# EAGLE board Drury-DABSC_array (EAGLE 7.7.0)
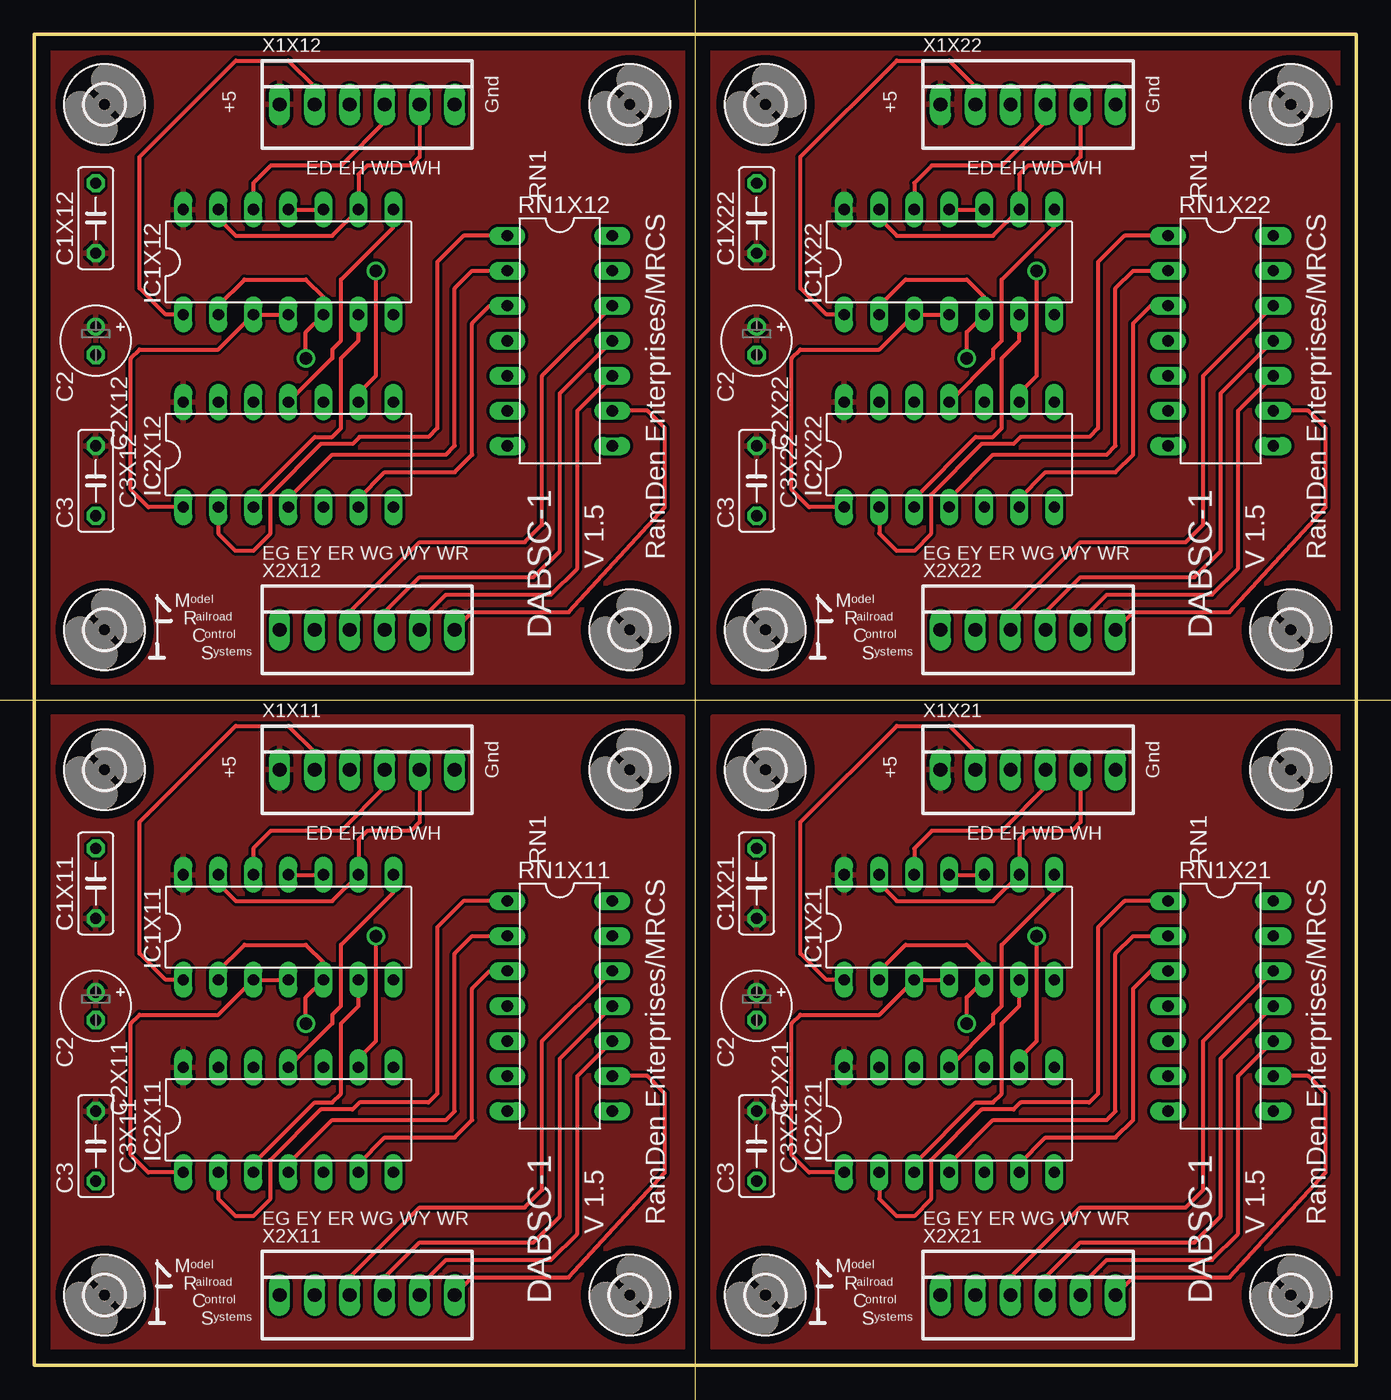
[diagram p0: board, top side]
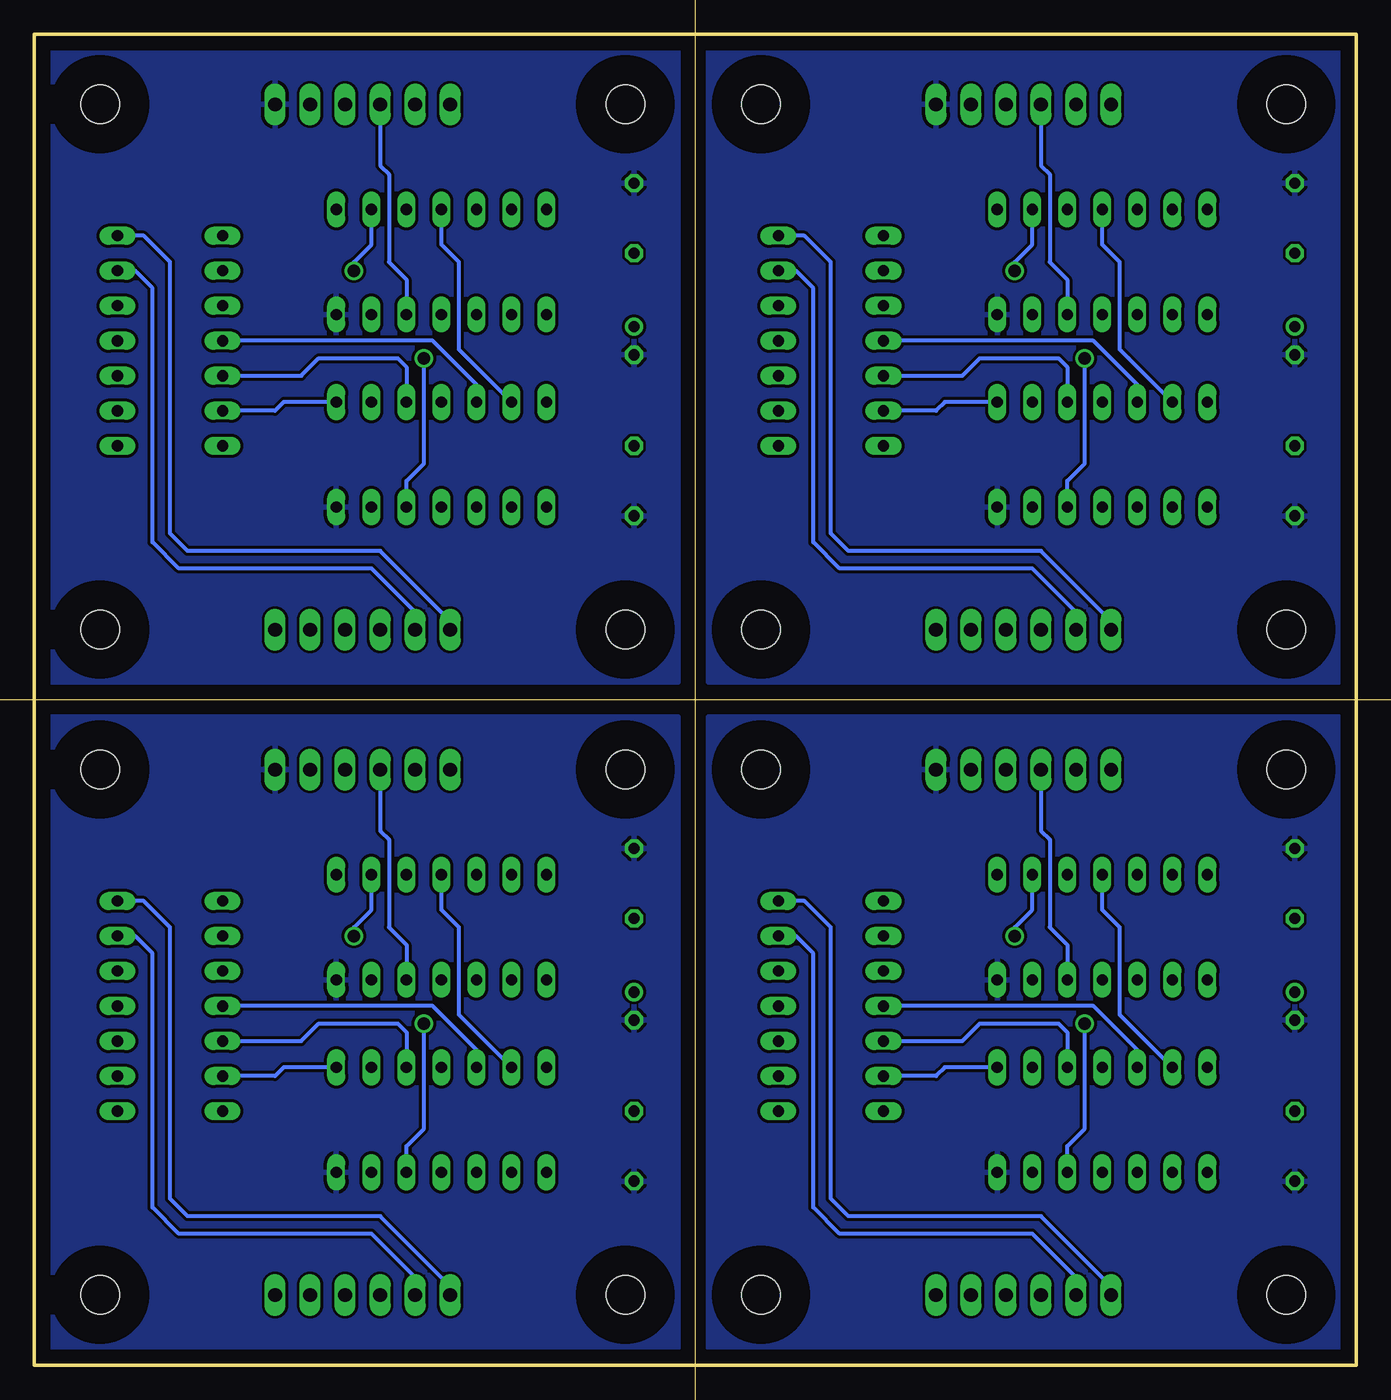
[diagram p1: board, bottom side, seen from below]

Size 95.86 x 96.5 mm. Coordinates in mm from the lower left corner, seen from the top.
Outline: 0,0 95.86,0 95.86,96.5 0,96.5 0,0
Copper layers (1*16): Top 0.035mm / dielectric 1.5mm / Bottom 0.035mm
Design rules "default": minimum track width 10mil, minimum drill 0.6mm, track to track 8mil, track to pad 8mil, pad to pad 8mil, via to via 8mil, smd to smd 8mil, copper to edge 40mil, drill to drill 8mil, minimum pad ring 10mil, minimum via ring 8mil, stop-mask expansion 4mil, vias tented up to drill 0mil, thermal gap 10mil
Milling: 2 lines

## Footprints (pad centres in the part's own frame; a part is rotated, then mirrored left to right if it is on the bottom)
C050-025X075 = drill 0.813 octagon: 1 -2.54,0; 2 2.54,0
E2-5 = drill 0.813 pad 1.27: + -1.016,0 | drill 0.813 pad 1.27 octagon: - 1.016,0
DIL14 = drill 0.813 long: 1 -7.62,-3.81; 2 -5.08,-3.81; 3 -2.54,-3.81; 4 0,-3.81; 5 2.54,-3.81; 6 5.08,-3.81; 7 7.62,-3.81; 8 7.62,3.81; 9 5.08,3.81; 10 2.54,3.81; 11 0,3.81; 12 -2.54,3.81; 13 -5.08,3.81; 14 -7.62,3.81
2,8 = hole 2.8: 0,0
22-23-2061 = drill 1 long: 1 -6.35,0; 2 -3.81,0; 3 -1.27,0; 4 1.27,0; 5 3.81,0; 6 6.35,0

## Placement (x,y rotation side)
C1X11  .01uf  [C050-025X075]  4.45,34.92 90 top
C1X12  .01uf  [C050-025X075]  4.45,83.17 90 top
C1X21  .01uf  [C050-025X075]  52.38,34.92 90 top
C1X22  .01uf  [C050-025X075]  52.38,83.17 90 top
C2X11  10uF  [E2-5]  4.45,26.04 270 top
C2X12  10uF  [E2-5]  4.45,74.28 270 top
C2X21  10uF  [E2-5]  52.38,26.04 270 top
C2X22  10uF  [E2-5]  52.38,74.28 270 top
C3X11  .01uf  [C050-025X075]  4.45,15.88 270 top
C3X12  .01uf  [C050-025X075]  4.45,64.12 270 top
C3X21  .01uf  [C050-025X075]  52.38,15.88 270 top
C3X22  .01uf  [C050-025X075]  52.38,64.12 270 top
IC1X11  74LS00N  [DIL14]  18.41,31.75 0 top
IC1X12  74LS00N  [DIL14]  18.41,80 0 top
IC1X21  74LS00N  [DIL14]  66.34,31.75 0 top
IC1X22  74LS00N  [DIL14]  66.34,80 0 top
IC2X11  7407N  [DIL14]  18.41,17.78 0 top
IC2X12  7407N  [DIL14]  18.41,66.03 0 top
IC2X21  7407N  [DIL14]  66.34,17.78 0 top
IC2X22  7407N  [DIL14]  66.34,66.03 0 top
RN1X11  1K  [DIL14]  38.1,26.04 270 top
RN1X12  1K  [DIL14]  38.1,74.28 270 top
RN1X21  1K  [DIL14]  86.03,26.04 270 top
RN1X22  1K  [DIL14]  86.03,74.28 270 top
U$1X11  [2,8]  5.08,43.18 0 top
U$1X12  [2,8]  5.08,91.43 0 top
U$1X21  [2,8]  53.01,43.18 0 top
U$1X22  [2,8]  53.01,91.43 0 top
U$2X11  [2,8]  43.18,43.18 0 top
U$2X12  [2,8]  43.18,91.43 0 top
U$2X21  [2,8]  91.11,43.18 0 top
U$2X22  [2,8]  91.11,91.43 0 top
U$3X11  [2,8]  5.08,5.08 0 top
U$3X12  [2,8]  5.08,53.33 0 top
U$3X21  [2,8]  53.01,5.08 0 top
U$3X22  [2,8]  53.01,53.33 0 top
U$4X11  [2,8]  43.18,5.08 0 top
U$4X12  [2,8]  43.18,53.33 0 top
U$4X21  [2,8]  91.11,5.08 0 top
U$4X22  [2,8]  91.11,53.33 0 top
U$5X11  [MRCSLOGOTOP]  7.62,2.54 0 top
U$5X12  [MRCSLOGOTOP]  7.62,50.79 0 top
U$5X21  [MRCSLOGOTOP]  55.55,2.54 0 top
U$5X22  [MRCSLOGOTOP]  55.55,50.79 0 top
U$6X11  [CA-PROP65-BACK]  34.92,6.99 0 top
U$6X12  [CA-PROP65-BACK]  34.92,55.23 0 top
U$6X21  [CA-PROP65-BACK]  82.86,6.99 0 top
U$6X22  [CA-PROP65-BACK]  82.86,55.23 0 top
X1X11  P1  [22-23-2061]  24.13,43.18 0 top
X1X12  P1  [22-23-2061]  24.13,91.43 0 top
X1X21  P1  [22-23-2061]  72.06,43.18 0 top
X1X22  P1  [22-23-2061]  72.06,91.43 0 top
X2X11  P2  [22-23-2061]  24.13,5.08 0 top
X2X12  P2  [22-23-2061]  24.13,53.33 0 top
X2X21  P2  [22-23-2061]  72.06,5.08 0 top
X2X22  P2  [22-23-2061]  72.06,53.33 0 top

## Library data of the parts
C1X11 C1X12 C1X21 C1X22 C3X11 C3X12 C3X21 C3X22 = resistor
C2X11 C2X12 C2X21 C2X22 U$5X11 U$5X12 U$5X21 U$5X22 U$6X11 U$6X12 U$6X21 U$6X22 = SPCoast
IC1X11 IC1X12 IC1X21 IC1X22 IC2X11 IC2X12 IC2X21 IC2X22 = 74xx-us
RN1X11 RN1X12 RN1X21 RN1X22 = resistor-dil
U$1X11 U$1X12 U$1X21 U$1X22 U$2X11 U$2X12 U$2X21 U$2X22 U$3X11 U$3X12 U$3X21 U$3X22 U$4X11 U$4X12 U$4X21 U$4X22 = holes
X1X11 X1X12 X1X21 X1X22 X2X11 X2X12 X2X21 X2X22 = con-molex

## Nets
GNDX11: C1X11.2 C2X11.- C3X11.2 IC1X11.7 IC2X11.7 X1X11.6
GNDX12: C1X12.2 C2X12.- C3X12.2 IC1X12.7 IC2X12.7 X1X12.6
GNDX21: C1X21.2 C2X21.- C3X21.2 IC1X21.7 IC2X21.7 X1X21.6
GNDX22: C1X22.2 C2X22.- C3X22.2 IC1X22.7 IC2X22.7 X1X22.6
N$1X11: IC1X11.3 IC1X11.4 IC2X11.1
N$1X12: IC1X12.3 IC1X12.4 IC2X12.1
N$1X21: IC1X21.3 IC1X21.4 IC2X21.1
N$1X22: IC1X22.3 IC1X22.4 IC2X22.1
N$2X11: IC1X11.6 IC2X11.3
N$2X12: IC1X12.6 IC2X12.3
N$2X21: IC1X21.6 IC2X21.3
N$2X22: IC1X22.6 IC2X22.3
N$3X11: IC2X11.2 RN1X11.1
N$3X12: IC2X12.2 RN1X12.1
N$3X21: IC2X21.2 RN1X21.1
N$3X22: IC2X22.2 RN1X22.1
N$4X11: IC1X11.8 IC2X11.11
N$4X12: IC1X12.8 IC2X12.11
N$4X21: IC1X21.8 IC2X21.11
N$4X22: IC1X22.8 IC2X22.11
N$5X11: IC2X11.4 RN1X11.2
N$5X12: IC2X12.4 RN1X12.2
N$5X21: IC2X21.4 RN1X21.2
N$5X22: IC2X22.4 RN1X22.2
N$6X11: IC1X11.10 IC1X11.11 IC2X11.13
N$6X12: IC1X12.10 IC1X12.11 IC2X12.13
N$6X21: IC1X21.10 IC1X21.11 IC2X21.13
N$6X22: IC1X22.10 IC1X22.11 IC2X22.13
N$7X11: IC2X11.6 RN1X11.3
N$7X12: IC2X12.6 RN1X12.3
N$7X21: IC2X21.6 RN1X21.3
N$7X22: IC2X22.6 RN1X22.3
N$8X11: RN1X11.14 X2X11.1
N$8X12: RN1X12.14 X2X12.1
N$8X21: RN1X21.14 X2X21.1
N$8X22: RN1X22.14 X2X22.1
N$9X11: RN1X11.13 X2X11.2
N$9X12: RN1X12.13 X2X12.2
N$9X21: RN1X21.13 X2X21.2
N$9X22: RN1X22.13 X2X22.2
N$10X11: IC1X11.1 X1X11.2
N$10X12: IC1X12.1 X1X12.2
N$10X21: IC1X21.1 X1X21.2
N$10X22: IC1X22.1 X1X22.2
N$11X11: IC1X11.2 IC1X11.5 IC2X11.5 X1X11.3
N$11X12: IC1X12.2 IC1X12.5 IC2X12.5 X1X12.3
N$11X21: IC1X21.2 IC1X21.5 IC2X21.5 X1X21.3
N$11X22: IC1X22.2 IC1X22.5 IC2X22.5 X1X22.3
N$12X11: RN1X11.12 X2X11.3
N$12X12: RN1X12.12 X2X12.3
N$12X21: RN1X21.12 X2X21.3
N$12X22: RN1X22.12 X2X22.3
N$13X11: IC2X11.12 RN1X11.4
N$13X12: IC2X12.12 RN1X12.4
N$13X21: IC2X21.12 RN1X21.4
N$13X22: IC2X22.12 RN1X22.4
N$14X11: IC2X11.10 RN1X11.5
N$14X12: IC2X12.10 RN1X12.5
N$14X21: IC2X21.10 RN1X21.5
N$14X22: IC2X22.10 RN1X22.5
N$15X11: IC2X11.8 RN1X11.6
N$15X12: IC2X12.8 RN1X12.6
N$15X21: IC2X21.8 RN1X21.6
N$15X22: IC2X22.8 RN1X22.6
N$16X11: RN1X11.9 X2X11.6
N$16X12: RN1X12.9 X2X12.6
N$16X21: RN1X21.9 X2X21.6
N$16X22: RN1X22.9 X2X22.6
N$17X11: RN1X11.10 X2X11.5
N$17X12: RN1X12.10 X2X12.5
N$17X21: RN1X21.10 X2X21.5
N$17X22: RN1X22.10 X2X22.5
N$18X11: IC1X11.12 X1X11.4
N$18X12: IC1X12.12 X1X12.4
N$18X21: IC1X21.12 X1X21.4
N$18X22: IC1X22.12 X1X22.4
N$19X11: RN1X11.11 X2X11.4
N$19X12: RN1X12.11 X2X12.4
N$19X21: RN1X21.11 X2X21.4
N$19X22: RN1X22.11 X2X22.4
N$21X11: IC1X11.9 IC1X11.13 IC2X11.9 X1X11.5
N$21X12: IC1X12.9 IC1X12.13 IC2X12.9 X1X12.5
N$21X21: IC1X21.9 IC1X21.13 IC2X21.9 X1X21.5
N$21X22: IC1X22.9 IC1X22.13 IC2X22.9 X1X22.5
VCCX11: C1X11.1 C2X11.+ C3X11.1 IC1X11.14 IC2X11.14 X1X11.1
VCCX12: C1X12.1 C2X12.+ C3X12.1 IC1X12.14 IC2X12.14 X1X12.1
VCCX21: C1X21.1 C2X21.+ C3X21.1 IC1X21.14 IC2X21.14 X1X21.1
VCCX22: C1X22.1 C2X22.+ C3X22.1 IC1X22.14 IC2X22.14 X1X22.1

## Tracks (layer width: path | path; a pad name or v marks a point on that pad's centre or on a via)
GNDX11
  pour Bottom: 1.27,1.27 46.99,1.27 46.99,46.99 1.27,46.99
GNDX12
  pour Bottom: 1.27,49.52 46.99,49.52 46.99,95.24 1.27,95.24
GNDX21
  pour Bottom: 49.2,1.27 94.92,1.27 94.92,46.99 49.2,46.99
GNDX22
  pour Bottom: 49.2,49.52 94.92,49.52 94.92,95.24 49.2,95.24
N$1X11
  Top 0.305: IC2X11.1 8.26,13.97 6.99,15.24 6.99,24.77 7.62,25.4 13.34,25.4 IC1X11.3 IC1X11.4
N$1X12
  Top 0.305: IC2X12.1 8.26,62.22 6.99,63.49 6.99,73.02 7.62,73.65 13.34,73.65 IC1X12.3 IC1X12.4
N$1X21
  Top 0.305: IC2X21.1 56.19,13.97 54.91,15.24 54.91,24.77 55.55,25.4 61.27,25.4 IC1X21.3 IC1X21.4
N$1X22
  Top 0.305: IC2X22.1 56.19,62.22 54.91,63.49 54.91,73.02 55.55,73.65 61.27,73.65 IC1X22.3 IC1X22.4
N$2X11
  Top 0.305: IC2X11.3 15.88,14.61 20.32,19.05 21.59,19.05 22.23,19.68 22.23,24.77 23.5,26.04 IC1X11.6
N$2X12
  Top 0.305: IC2X12.3 15.88,62.85 20.32,67.3 21.59,67.3 22.23,67.94 22.23,73.02 23.5,74.28 IC1X12.6
N$2X21
  Top 0.305: IC2X21.3 63.8,14.61 68.25,19.05 69.52,19.05 70.16,19.68 70.16,24.77 71.42,26.04 IC1X21.6
N$2X22
  Top 0.305: IC2X22.3 63.8,62.85 68.25,67.3 69.52,67.3 70.16,67.94 70.16,73.02 71.42,74.28 IC1X22.6
N$3X11
  Top 0.305: RN1X11.1 31.11,33.66 29.21,31.75 29.21,19.68 28.57,19.05 23.58,19.05 23.07,18.54 20.76,18.54 17.08,14.86 17.08,12 15.88,10.79 14.61,10.79 13.34,12.06 IC2X11.2
N$3X12
  Top 0.305: RN1X12.1 31.11,81.91 29.21,80 29.21,67.94 28.57,67.3 23.58,67.3 23.07,66.79 20.76,66.79 17.08,63.11 17.08,60.25 15.88,59.05 14.61,59.05 13.34,60.31 IC2X12.2
N$3X21
  Top 0.305: RN1X21.1 79.05,33.66 77.14,31.75 77.14,19.68 76.5,19.05 71.51,19.05 71,18.54 68.69,18.54 65.01,14.86 65.01,12 63.8,10.79 62.53,10.79 61.27,12.06 IC2X21.2
N$3X22
  Top 0.305: RN1X22.1 79.05,81.91 77.14,80 77.14,67.94 76.5,67.3 71.51,67.3 71,66.79 68.69,66.79 65.01,63.11 65.01,60.25 63.8,59.05 62.53,59.05 61.27,60.31 IC2X22.2
N$4X11
  Top 0.305: IC1X11.8 26.04,34.29 22.23,30.48 22.23,26.04 21.59,25.4 21.59,24.77 IC2X11.11
N$4X12
  Top 0.305: IC1X12.8 26.04,82.54 22.23,78.73 22.23,74.28 21.59,73.65 21.59,73.02 IC2X12.11
N$4X21
  Top 0.305: IC1X21.8 73.97,34.29 70.16,30.48 70.16,26.04 69.52,25.4 69.52,24.77 IC2X21.11
N$4X22
  Top 0.305: IC1X22.8 73.97,82.54 70.16,78.73 70.16,74.28 69.52,73.65 69.52,73.02 IC2X22.11
N$5X11
  Top 0.305: IC2X11.4 18.41,14.61 21.59,17.78 29.84,17.78 30.48,18.41 30.48,29.84 31.75,31.11 RN1X11.2
N$5X12
  Top 0.305: IC2X12.4 18.41,62.85 21.59,66.03 29.84,66.03 30.48,66.67 30.48,78.09 31.75,79.36 RN1X12.2
N$5X21
  Top 0.305: IC2X21.4 66.34,14.61 69.52,17.78 77.78,17.78 78.41,18.41 78.41,29.84 79.68,31.11 RN1X21.2
N$5X22
  Top 0.305: IC2X22.4 66.34,62.85 69.52,66.03 77.78,66.03 78.41,66.67 78.41,78.09 79.68,79.36 RN1X22.2
N$6X11
  Top 0.305: IC1X11.11 IC1X11.10
  Bottom 0.305: IC2X11.13 17.14,25.4 17.14,31.75 18.41,33.02 IC1X11.11
N$6X12
  Top 0.305: IC1X12.11 IC1X12.10
  Bottom 0.305: IC2X12.13 17.14,73.65 17.14,80 18.41,81.27 IC1X12.11
N$6X21
  Top 0.305: IC1X21.11 IC1X21.10
  Bottom 0.305: IC2X21.13 65.08,25.4 65.08,31.75 66.34,33.02 IC1X21.11
N$6X22
  Top 0.305: IC1X22.11 IC1X22.10
  Bottom 0.305: IC2X22.13 65.08,73.65 65.08,80 66.34,81.27 IC1X22.11
N$7X11
  Top 0.305: IC2X11.6 23.5,14.61 25.4,16.51 30.48,16.51 31.75,17.78 31.75,27.3 33.02,28.57 RN1X11.3
N$7X12
  Top 0.305: IC2X12.6 23.5,62.85 25.4,64.76 30.48,64.76 31.75,66.03 31.75,75.56 33.02,76.83 RN1X12.3
N$7X21
  Top 0.305: IC2X21.6 71.42,14.61 73.33,16.51 78.41,16.51 79.68,17.78 79.68,27.3 80.95,28.57 RN1X21.3
N$7X22
  Top 0.305: IC2X22.6 71.42,62.85 73.33,64.76 78.41,64.76 79.68,66.03 79.68,75.56 80.95,76.83 RN1X22.3
N$8X11
  Bottom 0.305: X2X11.1 17.78,5.71 22.86,10.79 36.83,10.79 38.1,12.06 38.1,31.75 40.01,33.66 RN1X11.14
N$8X12
  Bottom 0.305: X2X12.1 17.78,53.97 22.86,59.05 36.83,59.05 38.1,60.31 38.1,80 40.01,81.91 RN1X12.14
N$8X21
  Bottom 0.305: X2X21.1 65.71,5.71 70.79,10.79 84.76,10.79 86.03,12.06 86.03,31.75 87.94,33.66 RN1X21.14
N$8X22
  Bottom 0.305: X2X22.1 65.71,53.97 70.79,59.05 84.76,59.05 86.03,60.31 86.03,80 87.94,81.91 RN1X22.14
N$9X11
  Bottom 0.305: X2X11.2 20.32,6.35 23.5,9.53 37.47,9.53 39.37,11.43 39.37,29.84 40.64,31.11 RN1X11.13
N$9X12
  Bottom 0.305: X2X12.2 20.32,54.6 23.5,57.77 37.47,57.77 39.37,59.68 39.37,78.09 40.64,79.36 RN1X12.13
N$9X21
  Bottom 0.305: X2X21.2 68.25,6.35 71.42,9.53 85.39,9.53 87.3,11.43 87.3,29.84 88.57,31.11 RN1X21.13
N$9X22
  Bottom 0.305: X2X22.2 68.25,54.6 71.42,57.77 85.39,57.77 87.3,59.68 87.3,78.09 88.57,79.36 RN1X22.13
N$10X11
  Top 0.305: IC1X11.1 9.53,27.94 7.62,29.84 7.62,39.37 14.61,46.35 18.41,46.35 20.32,44.45 X1X11.2
N$10X12
  Top 0.305: IC1X12.1 9.53,76.19 7.62,78.09 7.62,87.62 14.61,94.61 18.41,94.61 20.32,92.7 X1X12.2
N$10X21
  Top 0.305: IC1X21.1 57.45,27.94 55.55,29.84 55.55,39.37 62.53,46.35 66.34,46.35 68.25,44.45 X1X21.2
N$10X22
  Top 0.305: IC1X22.1 57.45,76.19 55.55,78.09 55.55,87.62 62.53,94.61 66.34,94.61 68.25,92.7 X1X22.2
N$11X11  (via drill 0.9 pad 1.35)
  Top 0.305: IC1X11.2 13.34,28.57 15.24,30.48 19.68,30.48 20.95,29.21 IC1X11.5 19.68,26.67 v19.68,24.77
  Bottom 0.305: X1X11.3 22.86,38.73 22.23,38.1 22.23,31.75 20.95,30.48 IC1X11.5 | IC2X11.5 20.95,15.88 19.68,17.14 v19.68,24.77
N$11X12  (via drill 0.9 pad 1.35)
  Top 0.305: IC1X12.2 13.34,76.83 15.24,78.73 19.68,78.73 20.95,77.46 IC1X12.5 19.68,74.92 v19.68,73.02
  Bottom 0.305: X1X12.3 22.86,86.98 22.23,86.35 22.23,80 20.95,78.73 IC1X12.5 | IC2X12.5 20.95,64.12 19.68,65.39 v19.68,73.02
N$11X21  (via drill 0.9 pad 1.35)
  Top 0.305: IC1X21.2 61.27,28.57 63.17,30.48 67.61,30.48 68.89,29.21 IC1X21.5 67.61,26.67 v67.61,24.77
  Bottom 0.305: X1X21.3 70.79,38.73 70.16,38.1 70.16,31.75 68.89,30.48 IC1X21.5 | IC2X21.5 68.89,15.88 67.61,17.14 v67.61,24.77
N$11X22  (via drill 0.9 pad 1.35)
  Top 0.305: IC1X22.2 61.27,76.83 63.17,78.73 67.61,78.73 68.89,77.46 IC1X22.5 67.61,74.92 v67.61,73.02
  Bottom 0.305: X1X22.3 70.79,86.98 70.16,86.35 70.16,80 68.89,78.73 IC1X22.5 | IC2X22.5 68.89,64.12 67.61,65.39 v67.61,73.02
N$12X11
  Top 0.305: X2X11.3 22.86,6.35 27.94,11.43 35.56,11.43 36.83,12.7 36.83,23.5 RN1X11.12
N$12X12
  Top 0.305: X2X12.3 22.86,54.6 27.94,59.68 35.56,59.68 36.83,60.95 36.83,71.75 RN1X12.12
N$12X21
  Top 0.305: X2X21.3 70.79,6.35 75.87,11.43 83.49,11.43 84.76,12.7 84.76,23.5 RN1X21.12
N$12X22
  Top 0.305: X2X22.3 70.79,54.6 75.87,59.68 83.49,59.68 84.76,60.95 84.76,71.75 RN1X22.12
N$13X11
  Bottom 0.305: IC2X11.12 15.88,22.86 19.05,26.04 RN1X11.4
N$13X12
  Bottom 0.305: IC2X12.12 15.88,71.11 19.05,74.28 RN1X12.4
N$13X21
  Bottom 0.305: IC2X21.12 63.8,22.86 66.98,26.04 RN1X21.4
N$13X22
  Bottom 0.305: IC2X22.12 63.8,71.11 66.98,74.28 RN1X22.4
N$14X11
  Bottom 0.305: RN1X11.5 28.57,23.5 27.3,24.77 21.59,24.77 20.95,24.13 IC2X11.10
N$14X12
  Bottom 0.305: RN1X12.5 28.57,71.75 27.3,73.02 21.59,73.02 20.95,72.38 IC2X12.10
N$14X21
  Bottom 0.305: RN1X21.5 76.5,23.5 75.23,24.77 69.52,24.77 68.89,24.13 IC2X21.10
N$14X22
  Bottom 0.305: RN1X22.5 76.5,71.75 75.23,73.02 69.52,73.02 68.89,72.38 IC2X22.10
N$15X11
  Bottom 0.305: IC2X11.8 29.84,21.59 30.48,20.95 RN1X11.6
N$15X12
  Bottom 0.305: IC2X12.8 29.84,69.84 30.48,69.2 RN1X12.6
N$15X21
  Bottom 0.305: IC2X21.8 77.78,21.59 78.41,20.95 RN1X21.6
N$15X22
  Bottom 0.305: IC2X22.8 77.78,69.84 78.41,69.2 RN1X22.6
N$16X11
  Top 0.305: RN1X11.9 44.45,20.95 45.72,19.68 45.72,13.97 38.73,6.35 31.75,6.35 X2X11.6
N$16X12
  Top 0.305: RN1X12.9 44.45,69.2 45.72,67.94 45.72,62.22 38.73,54.6 31.75,54.6 X2X12.6
N$16X21
  Top 0.305: RN1X21.9 92.38,20.95 93.65,19.68 93.65,13.97 86.67,6.35 79.68,6.35 X2X21.6
N$16X22
  Top 0.305: RN1X22.9 92.38,69.2 93.65,67.94 93.65,62.22 86.67,54.6 79.68,54.6 X2X22.6
N$17X11
  Top 0.305: X2X11.5 27.94,5.71 29.84,7.62 37.47,7.62 39.37,9.53 39.37,20.95 RN1X11.10
N$17X12
  Top 0.305: X2X12.5 27.94,53.97 29.84,55.87 37.47,55.87 39.37,57.77 39.37,69.2 RN1X12.10
N$17X21
  Top 0.305: X2X21.5 75.87,5.71 77.78,7.62 85.39,7.62 87.3,9.53 87.3,20.95 RN1X21.10
N$17X22
  Top 0.305: X2X22.5 75.87,53.97 77.78,55.87 85.39,55.87 87.3,57.77 87.3,69.2 RN1X22.10
N$18X11
  Top 0.305: X1X11.4 25.4,41.91 22.23,38.73 17.14,38.73 15.88,37.47 IC1X11.12
N$18X12
  Top 0.305: X1X12.4 25.4,90.16 22.23,86.98 17.14,86.98 15.88,85.72 IC1X12.12
N$18X21
  Top 0.305: X1X21.4 73.33,41.91 70.16,38.73 65.08,38.73 63.8,37.47 IC1X21.12
N$18X22
  Top 0.305: X1X22.4 73.33,90.16 70.16,86.98 65.08,86.98 63.8,85.72 IC1X22.12
N$19X11
  Top 0.305: X2X11.4 25.4,6.35 27.94,8.89 36.2,8.89 38.1,10.79 38.1,22.23 RN1X11.11
N$19X12
  Top 0.305: X2X12.4 25.4,54.6 27.94,57.14 36.2,57.14 38.1,59.05 38.1,70.47 RN1X12.11
N$19X21
  Top 0.305: X2X21.4 73.33,6.35 75.87,8.89 84.12,8.89 86.03,10.79 86.03,22.23 RN1X21.11
N$19X22
  Top 0.305: X2X22.4 73.33,54.6 75.87,57.14 84.12,57.14 86.03,59.05 86.03,70.47 RN1X22.11
N$21X11  (via drill 0.9 pad 1.35)
  Top 0.305: X1X11.5 27.94,39.37 27.3,38.73 24.13,38.73 23.5,38.1 IC1X11.9 21.59,33.66 14.61,33.66 13.34,34.92 IC1X11.13 | IC2X11.9 23.5,22.23 24.77,23.5 v24.77,31.11
  Bottom 0.305: v24.77,31.11 24.77,31.75 23.5,33.02 IC1X11.9
N$21X12  (via drill 0.9 pad 1.35)
  Top 0.305: X1X12.5 27.94,87.62 27.3,86.98 24.13,86.98 23.5,86.35 IC1X12.9 21.59,81.91 14.61,81.91 13.34,83.17 IC1X12.13 | IC2X12.9 23.5,70.47 24.77,71.75 v24.77,79.36
  Bottom 0.305: v24.77,79.36 24.77,80 23.5,81.27 IC1X12.9
N$21X21  (via drill 0.9 pad 1.35)
  Top 0.305: X1X21.5 75.87,39.37 75.23,38.73 72.06,38.73 71.42,38.1 IC1X21.9 69.52,33.66 62.53,33.66 61.27,34.92 IC1X21.13 | IC2X21.9 71.42,22.23 72.69,23.5 v72.69,31.11
  Bottom 0.305: v72.69,31.11 72.69,31.75 71.42,33.02 IC1X21.9
N$21X22  (via drill 0.9 pad 1.35)
  Top 0.305: X1X22.5 75.87,87.62 75.23,86.98 72.06,86.98 71.42,86.35 IC1X22.9 69.52,81.91 62.53,81.91 61.27,83.17 IC1X22.13 | IC2X22.9 71.42,70.47 72.69,71.75 v72.69,79.36
  Bottom 0.305: v72.69,79.36 72.69,80 71.42,81.27 IC1X22.9
VCCX11
  pour Top: 1.27,1.27 46.99,1.27 46.99,46.99 1.27,46.99
VCCX12
  pour Top: 1.27,49.52 46.99,49.52 46.99,95.24 1.27,95.24
VCCX21
  pour Top: 49.2,1.27 94.92,1.27 94.92,46.99 49.2,46.99
VCCX22
  pour Top: 49.2,49.52 94.92,49.52 94.92,95.24 49.2,95.24

## Text on the board
tPlace: ED EH WD WH | ED EH WD WH | EG EY ER WG WY WR | RamDen Enterprises/MRCS | EG EY ER WG WY WR | RamDen Enterprises/MRCS | ED EH WD WH | ED EH WD WH | EG EY ER WG WY WR | RamDen Enterprises/MRCS | EG EY ER WG WY WR | RamDen Enterprises/MRCS
tNames: +5 | Gnd | +5 | Gnd | V 1.5 | V 1.5 | DABSC-1 | DABSC-1 | +5 | Gnd | +5 | Gnd | V 1.5 | V 1.5 | DABSC-1 | DABSC-1
Milling: V-Score | V-Score
_tNames: RN1 | RN1 | C1 | C1 | IC1 | IC1 | C2 | C2 | IC2 | IC2 | C3 | C3 | RN1 | RN1 | C1 | C1 | IC1 | IC1 | C2 | C2 | IC2 | IC2 | C3 | C3